# Altium PCB PCB1.PcbDoc
Units mil, origin at the board's own origin, x right, y up, seen from the top; angles counter-clockwise.
Board outline 1480 x 1785 mil, 4 copper layers (Top Layer, GND, POWER, Bottom Layer), stack 23.756 mil thick; 45 components, 35 nets, 209 pads, 41 vias.
Unrouted connection lines stored in the file: 1.
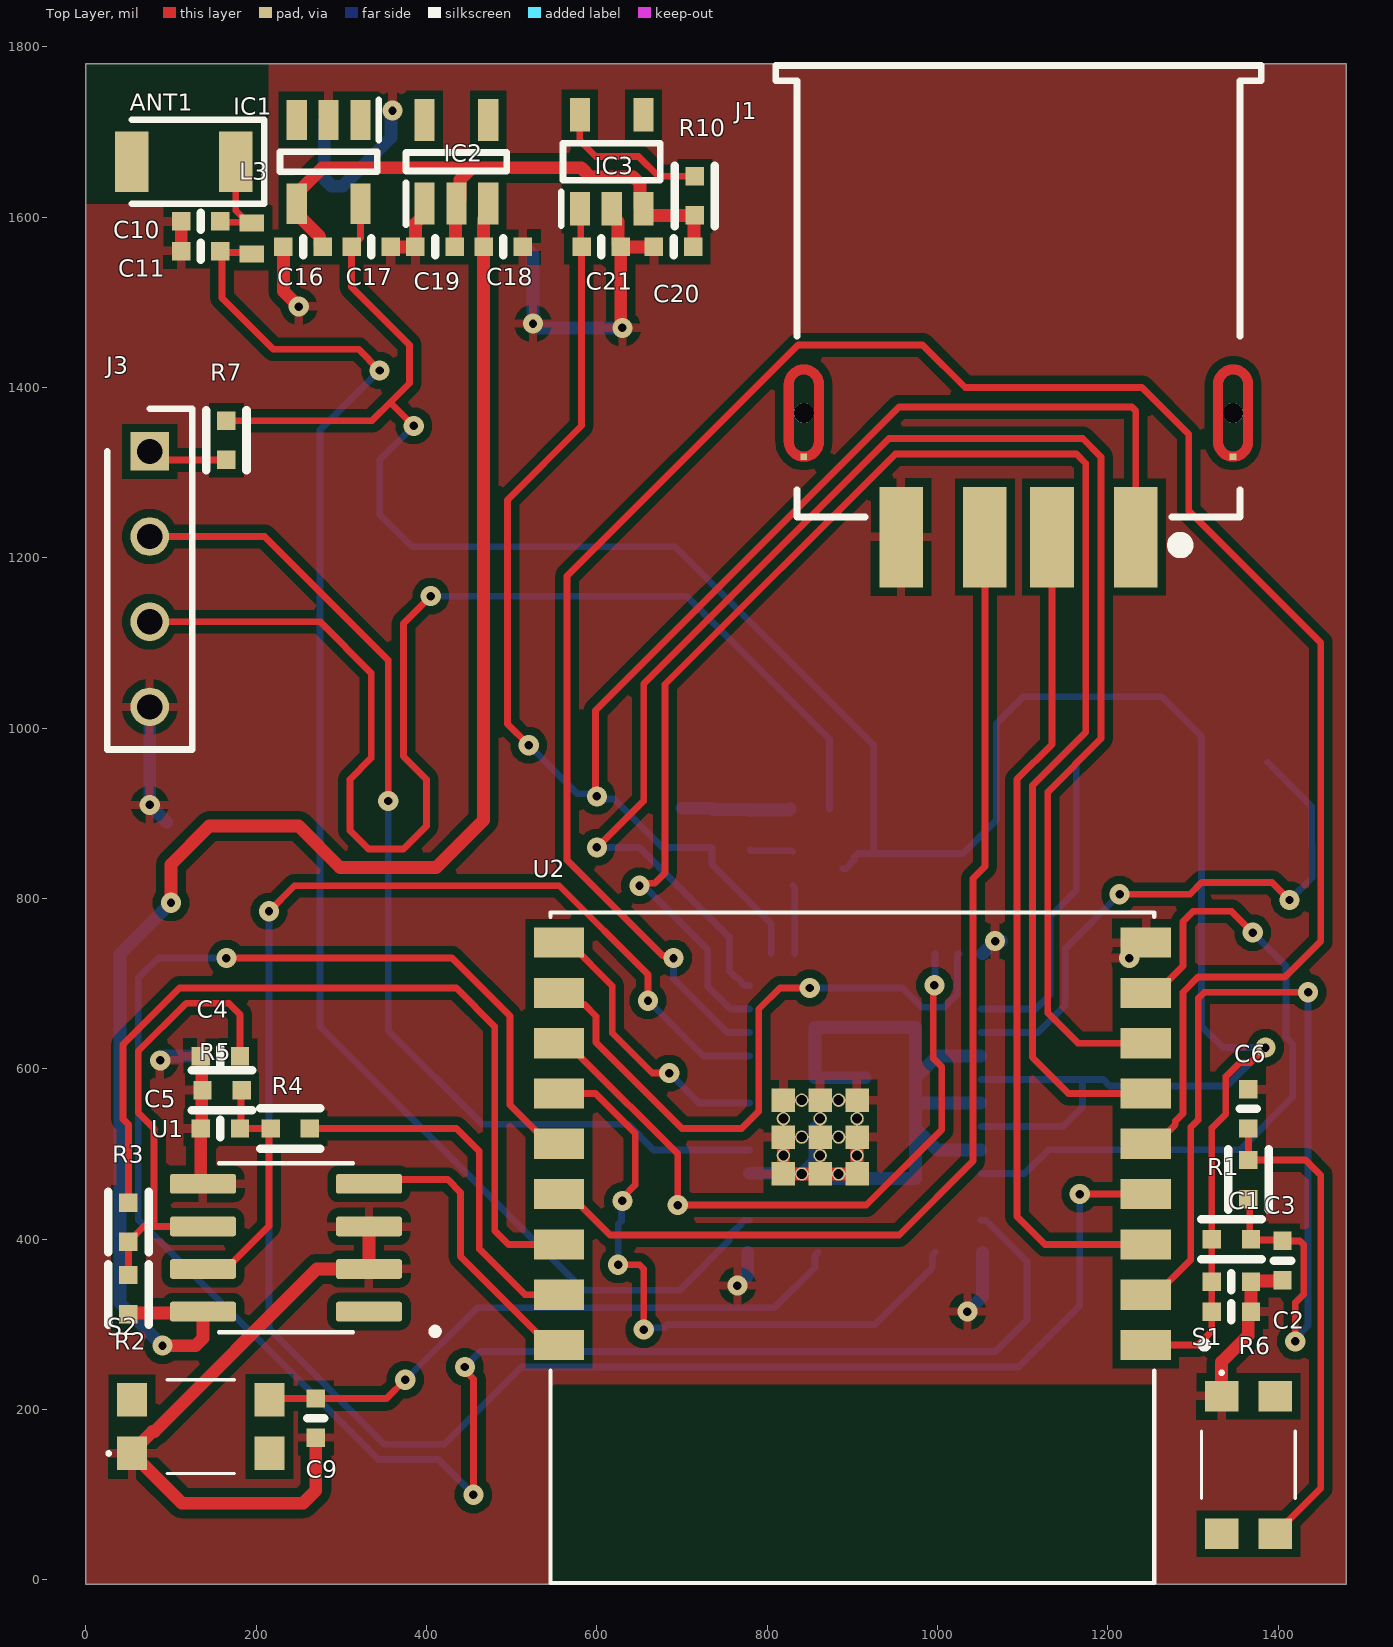
[diagram p0: Top Layer view]
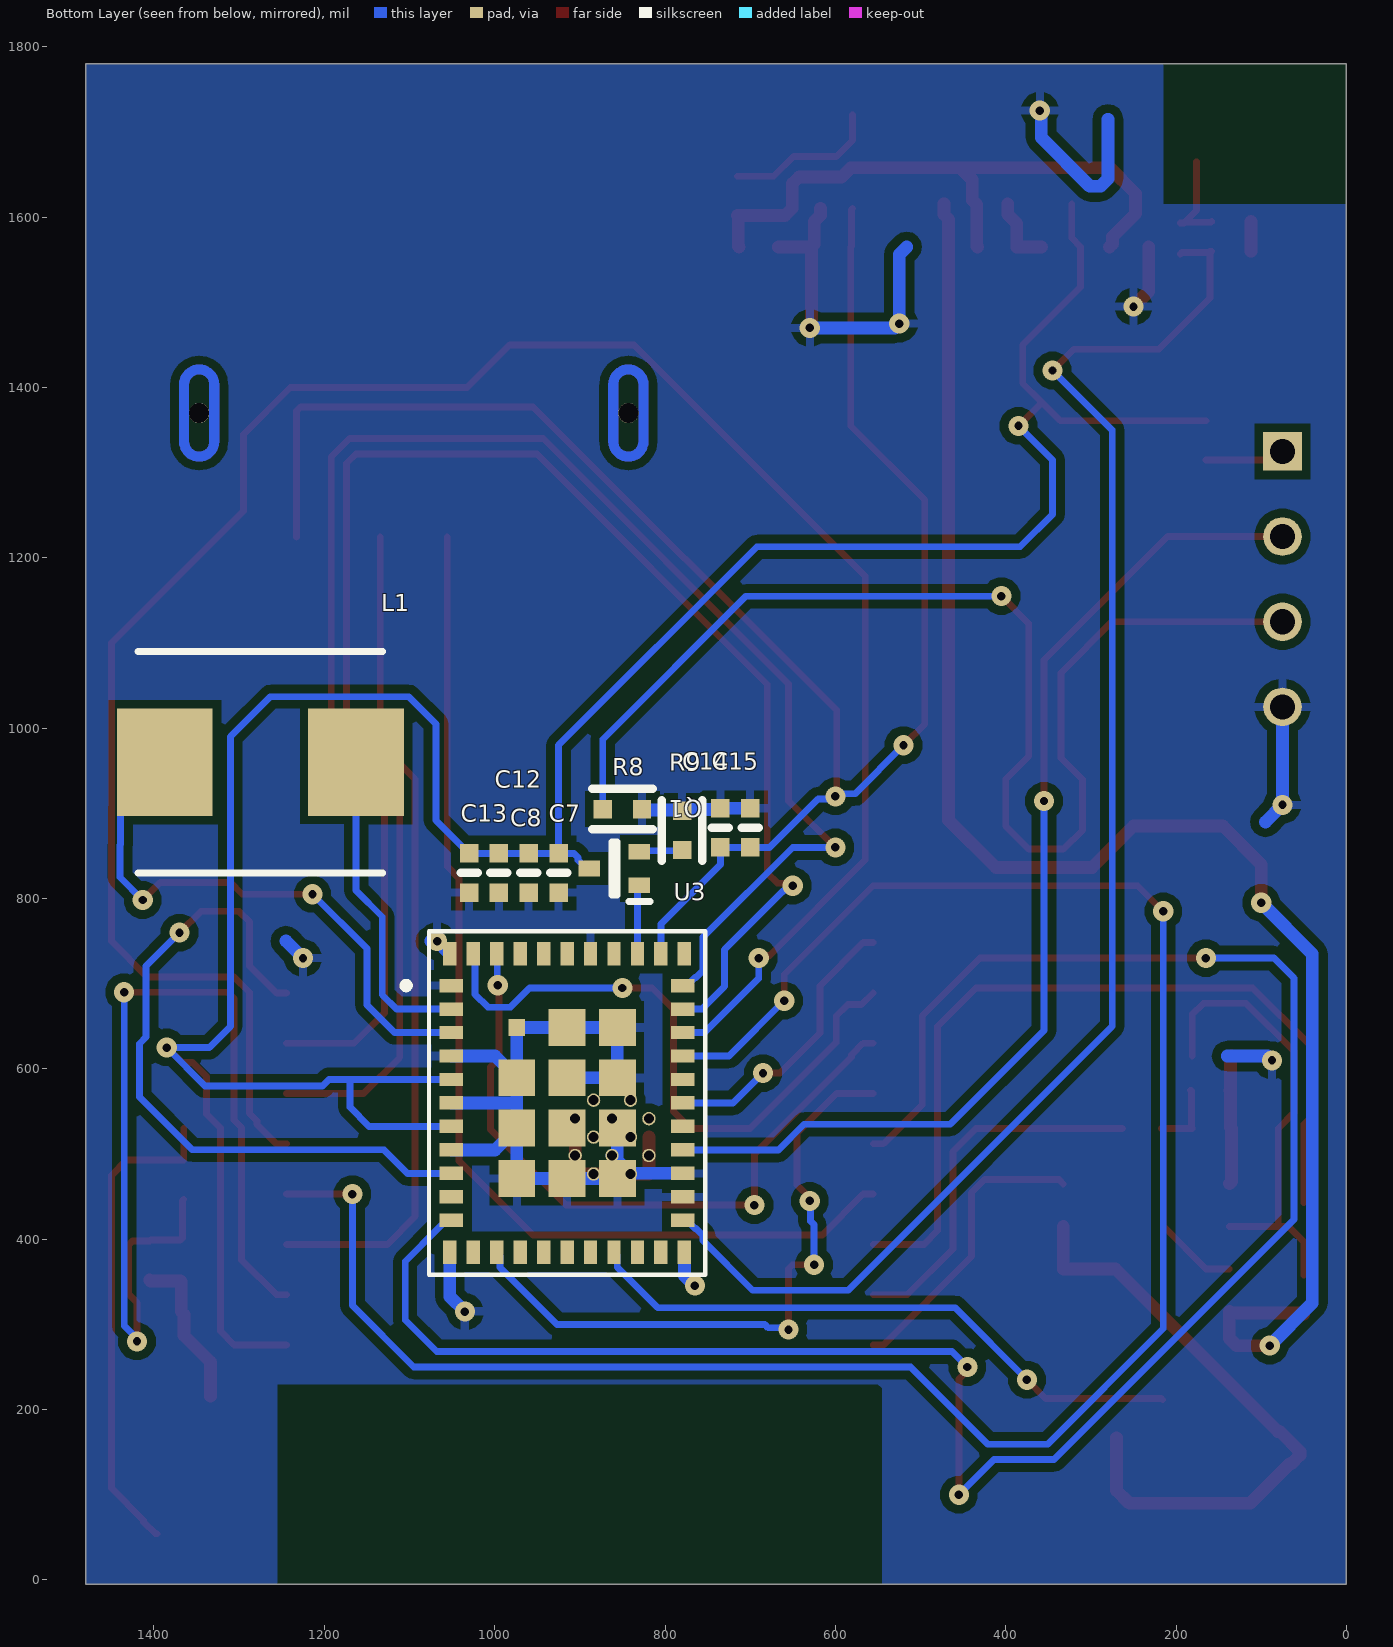
[diagram p1: Bottom Layer view, seen from below]
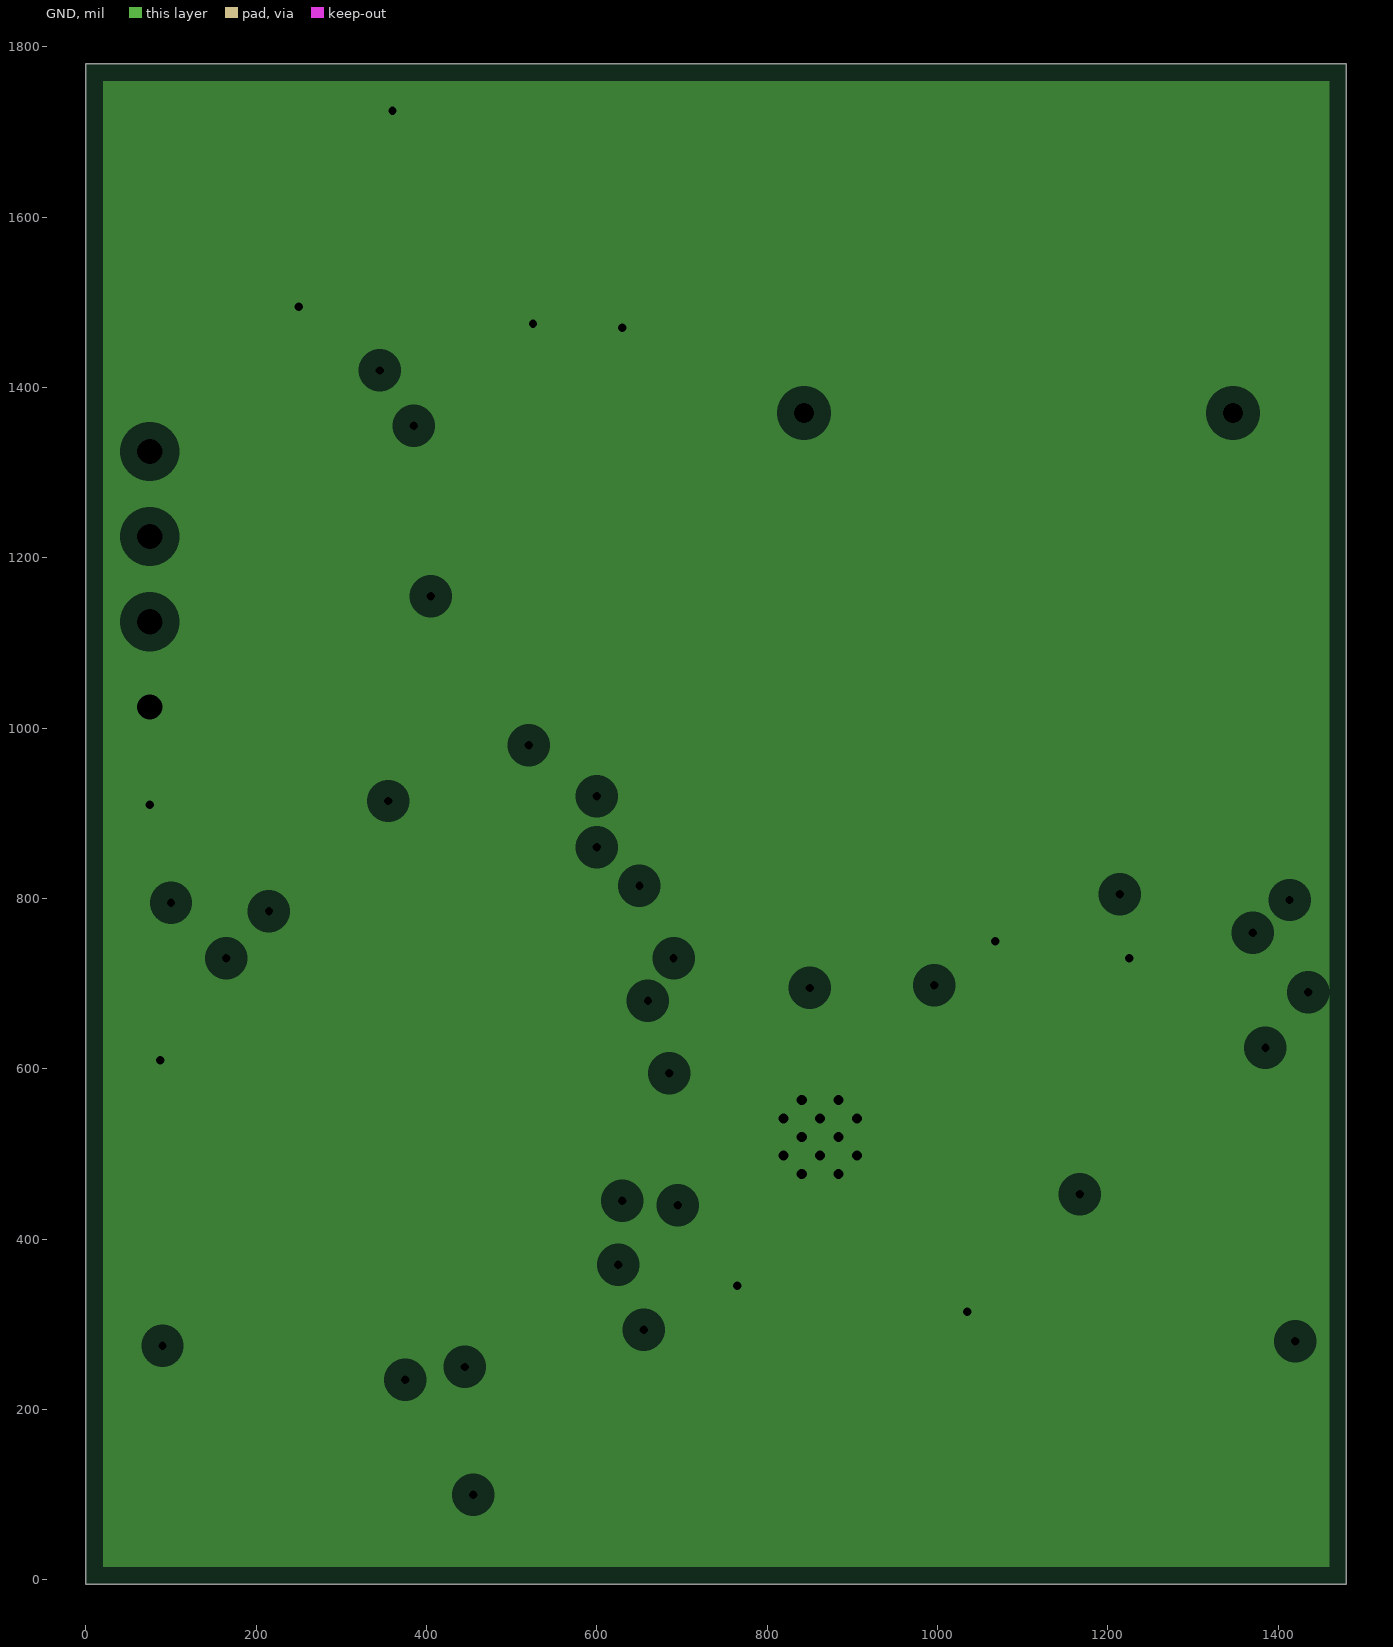
[diagram p2: GND, clearances drawn from the general rule]
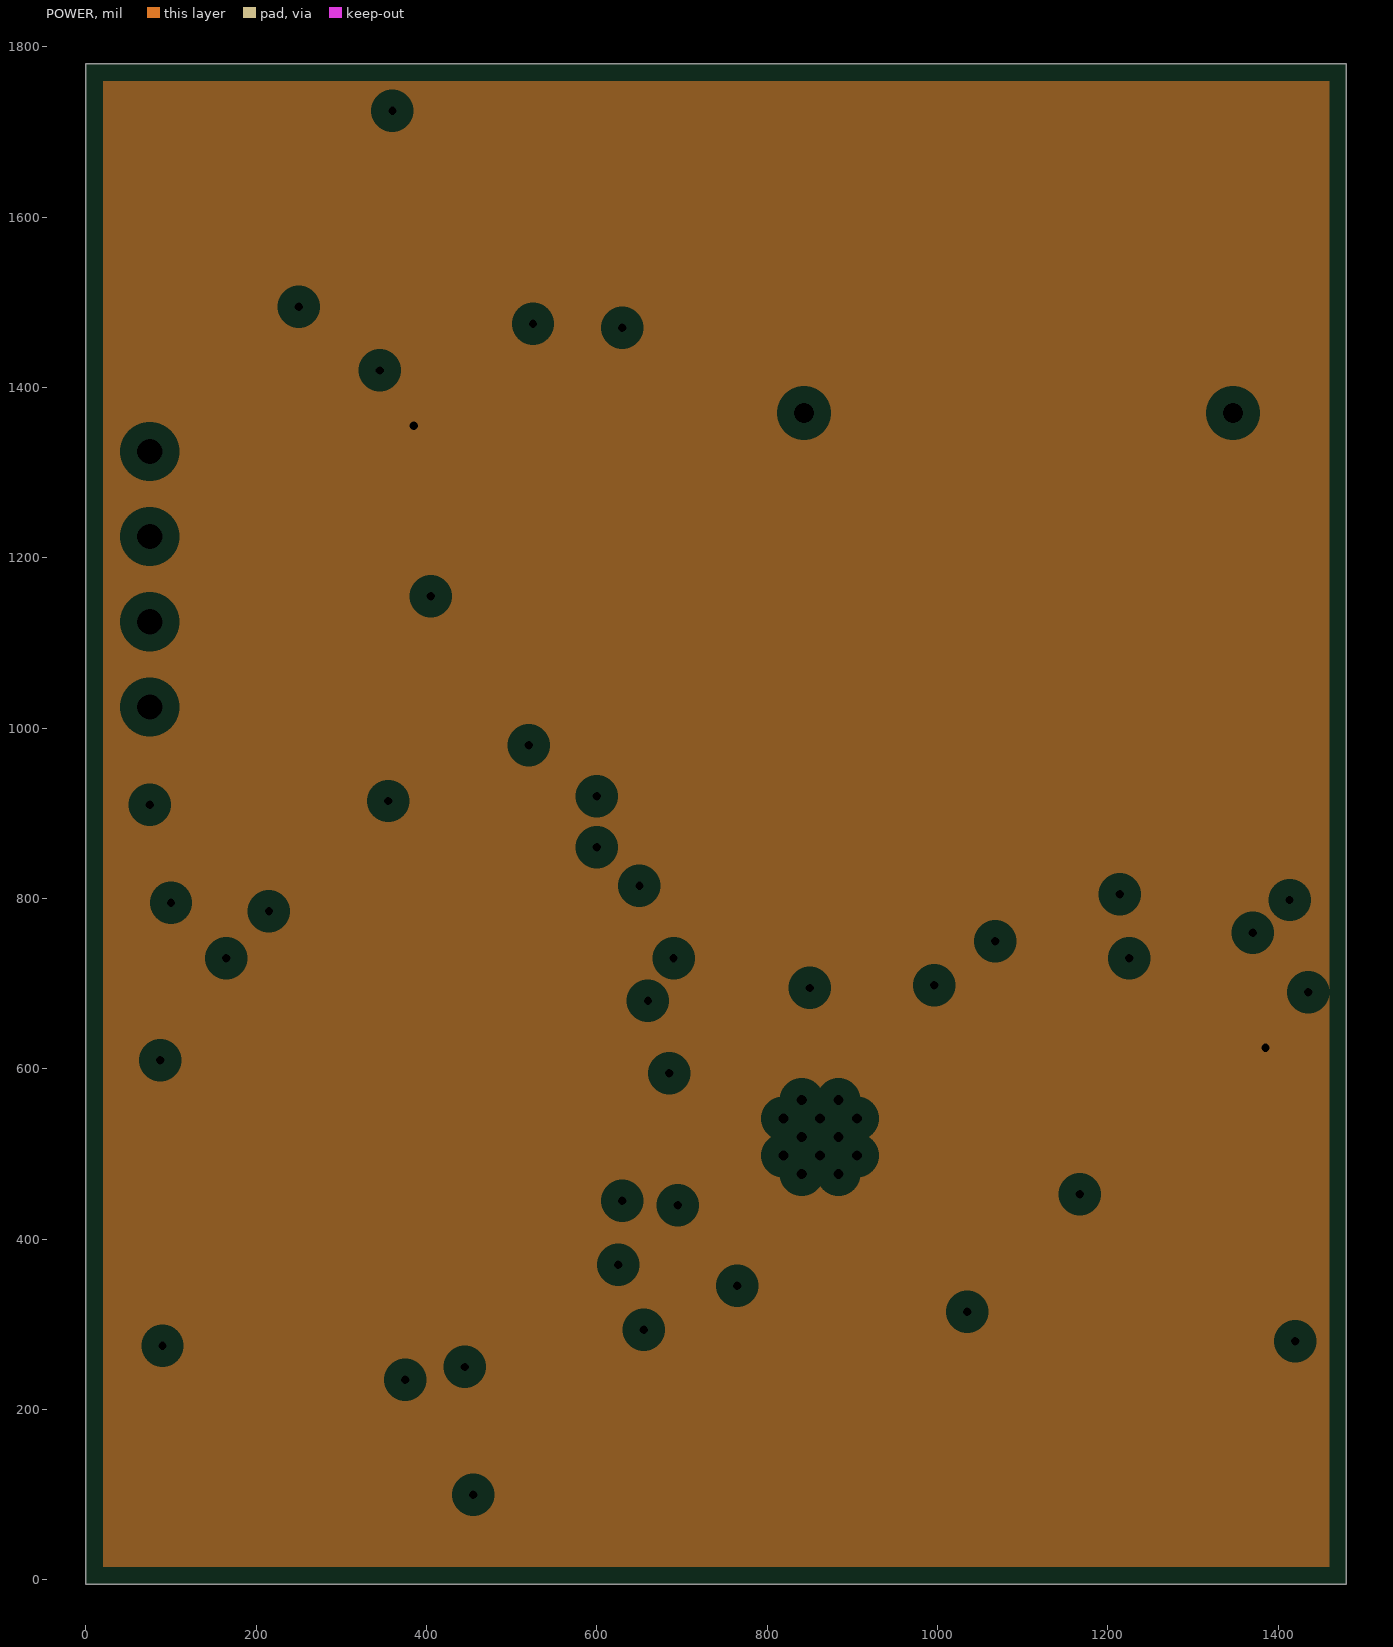
[diagram p3: POWER, clearances drawn from the general rule]
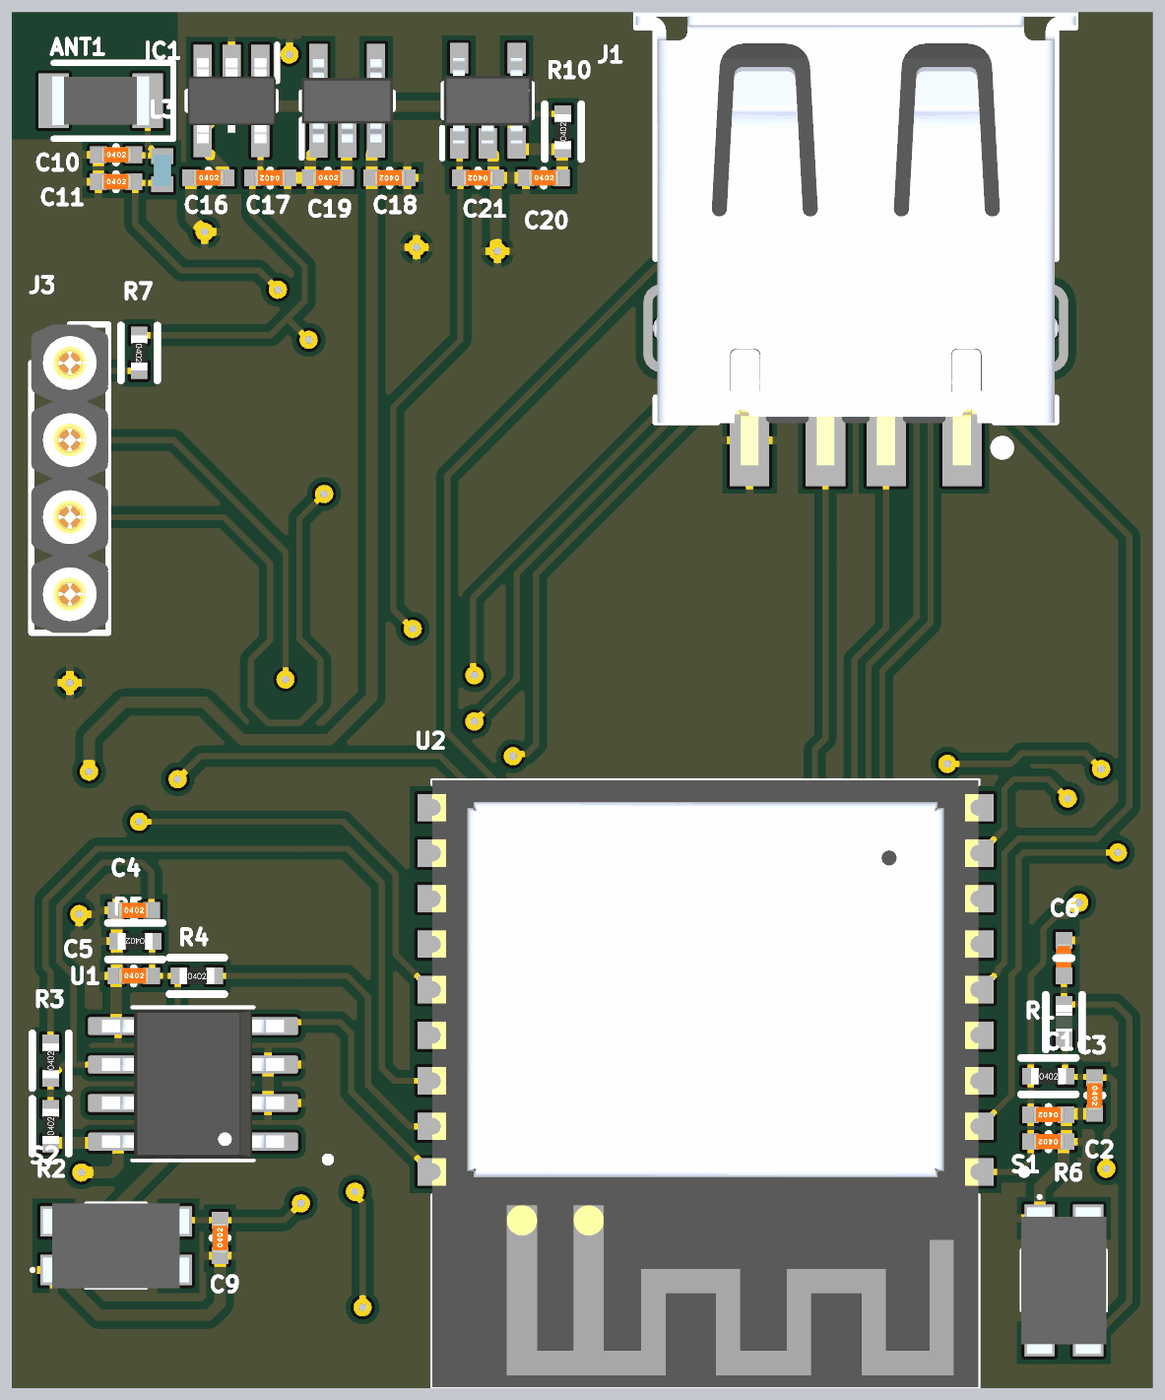
[diagram p4: 3D render of the assembled board from above, using the file's embedded part models]
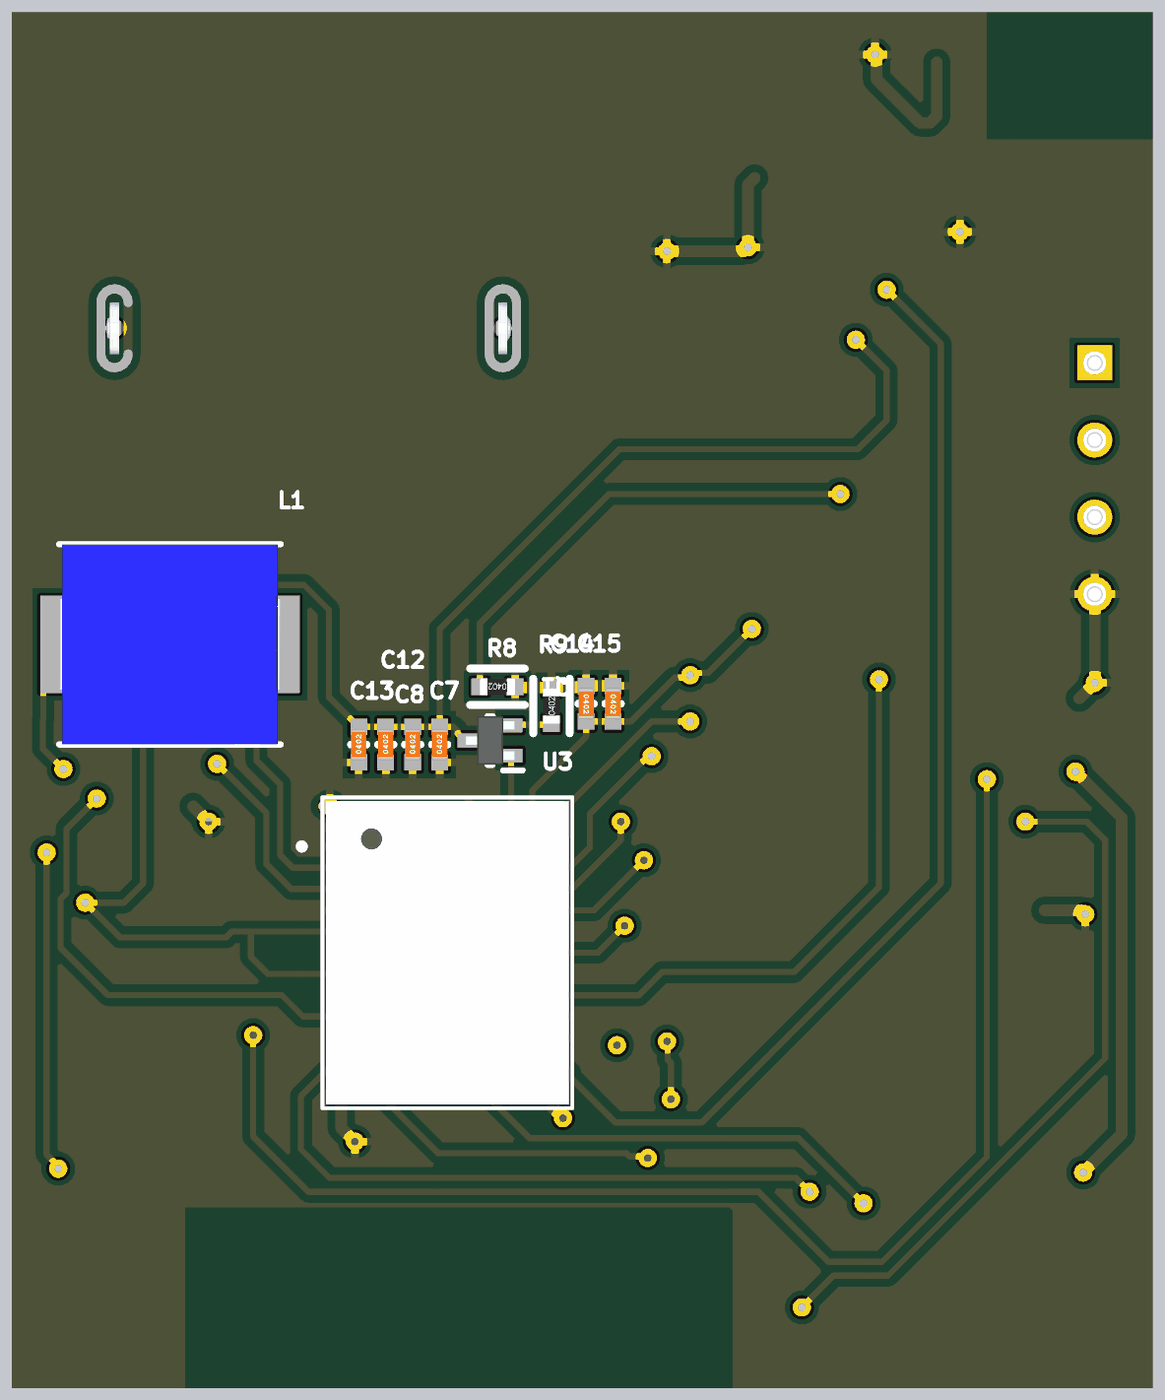
[diagram p5: 3D render of the assembled board from below, using the file's embedded part models]

## Layer stack, top to bottom
Top Solder: solder mask 0.4, Solder Resist, Dk 3.5
Top Layer: signal copper 1.4
Dielectric 2: prepreg 2.8, PP-006, Dk 4.1
GND: plane copper 1.378, net GND
Dielectric 1: dielectric 12.6, FR-4, Dk 4.8
POWER: plane copper 1.378, net VDD_RF
Dielectric 3: prepreg 2.8, PP-006, Dk 4.1
Bottom Layer: signal copper 1.4
Bottom Solder: solder mask 0.4, Solder Resist, Dk 3.5

## Board outline
0,-5 1480,-5 1480,1780 0,1780

## Design rules (kind name [scope] priority, off if disabled: settings)
Clearance [All] p1: gap=10 ignorepadtopadclearanceinfootprint=TRUE except(0: Arc-Hole Track-Hole SMDPad-Hole THPad-Hole Via-Hole Fill-Hole Poly-Hole Region-Hole Text-Hole)
PlaneClearance [All] p1: clearance=20
PlaneConnect [All] p1: planeconnectstyle=Relief reliefexpansion=20 reliefentries=4 reliefconductorwidth=10 reliefairgap=10
PolygonConnect [All] p1: connectstyle=Relief reliefconductorwidth=10 reliefentries=4 polygonreliefangle="90 Angle" airgapwidth=10
RoutingVias [All] p1: holewidth=9.84 width=23.62 viastyle="Through Hole" minholewidth=7.87 minwidth=19.68 maxholewidth=11.81 maxwidth=27.56
SolderMaskExpansion [All] p1: expansion=4 istentingtop=FALSE
Width [All] p1: maxlimit=100 minlimit=6 preferedwidth=10 minimp=50.000000 maximp=50.000000 favimp=50.000000
28 further rules are at their usual default settings.

## Classes and differential pairs
component class "Voltage Regulator": C16 C17 C18 C19 C20 C21 IC1 IC2 IC3 R10
component class "Main MCU": C1 C2 C3 C4 C5 C6 J1 R1 R2 R3 R4 R5 R6 S1 U1 U2
component class "Lora module": ANT1 C7 C8 C9 C10 C11 C12 C13 C14 C15 J3 L1 L3 Q1 R7 R8 R9 S2 U3

## Components (designator, comment, footprint, x,y, rotation, side; value= is the part's Value field where it differs from the comment)
ANT1 "2108838-1" ANTC3216X140N 115,1665 r180 top
C1 "0.10µF" SMD-0402C#1 1345,350 r90 top
C2 "10µF" SMD-0402C#1 1345,315 r90 top
C3 "0.10µF" SMD-0402C#1 1405,375 r180 top
C4 "2200pF" SMD-0402C#1 158,615 r270 top
C5 "2200pF" SMD-0402C#1 158,530 r270 top
C6 "0.10µF" SMD-0402C#2 1365,553 r180 top
C7 "0.10µF" SMD-0402C#1 925,830 r180 bottom
C8 "10µF" SMD-0402C#1 960,830 r180 bottom
C9 "0.10µF" SMD-0402C#1 270,190 r0 top
C10 "0.10µF" SMD-0402C#1 135,1595 r270 top
C11 "0.10µF" SMD-0402C#1 135,1560 r270 top
C12 "0.10µF" SMD-0402C#1 995,830 r180 bottom
C13 "10µF" SMD-0402C#1 1030,830 r180 bottom
C14 "0.10µF" SMD-0402C#1 735,883 r0 bottom
C15 "10µF" SMD-0402C#1 700,883 r0 bottom
C16 "0.10µF" SMD-0402C#1 255,1565 r270 top
C17 "0.47µF" SMD-0402C#1 335,1565 r90 top
C18 "1µF" SMD-0402C#1 490,1565 r90 top
C19 "1µF" SMD-0402C#1 410,1565 r270 top
C20 "0.10µF" SMD-0402C#1 690,1565 r270 top
C21 "0.10µF" SMD-0402C#1 605,1565 r90 top
IC1 "ST715M33R" SOT95P280X145-5N 285,1665 r270 top
IC2 "NCP716BCSN500T1G" SOT95P275X110-5N 435,1665 r90 top
IC3 "R1154N120B-TR-FE" SOT95P280X130-5N 617.4,1665.12 r90 top
J1 "USB1046-XX-XXXX-X-B-X_REVB" GCT_USB1046-XX-XXXX-X-B-X_REVB 1095,1370 r180 top
J3 "D01-9970442" RHDR4W53P0X254_1X4_1016X246X254P 75,1325 r270 top
L1 "SRP7028CC-150M" INDPM7366X300N 1275,960 r0 bottom
L3 "LQW15AN17NG8ZD" INDC1006X60N 195,1575 r270 top
Q1 "RE1C001UNTCL" SOTFL50P160X85-3N 859.53,835.32 r0 bottom
R1 "0.0" SMD-0402-RES#1 1345,400 r270 top
R2 "4.7k" SMD-0402-RES#1 50,335 r0 top
R3 "47k" SMD-0402-RES#1 50,420 r0 top
R4 "47k" SMD-0402-RES#1 240,530 r270 top
R5 "4.7k" SMD-0402-RES#1 160,575 r90 top
R6 "0.0" SMD-0402-RES#2 1365,470 r0 top
R7 "100k" SMD-0402-RES#1 165,1338 r180 top
R8 "100k" SMD-0402-RES#1 850,905 r90 bottom
R9 "10k" SMD-0402-RES#1 780,880 r180 bottom
R10 "10k" SMD-0402-RES#1 715,1625 r0 top
S1 "KMR241NGLFS" KMR241NGLFS 1365,135 r270 top
S2 "KMR241NGLFS" KMR241NGLFS 135,180 r0 top
U1 "MAX3444EESA" SOIC127P600X175-8N 235,390 r180 top
U2 "ESP32-C3-WROOM-02-H4" MODULE_ESP32-C3-WROOM-02-H4 900,390 r180 top
U3 "LBAA0QB1SJ-296" MODULE_LBAA0QB1SJ-296 915,560 r180 bottom

## Footprints (in the part's own frame and the unit in brackets; to place one, negate y for a bottom-side part, rotate by r counter-clockwise, add the part's x,y. Pads: shape width x height; smd on the part's side, far side on the other; paste and mask are expansions set on the pad)
ANTC3216X140N [mm]
  rect 1x1.8 smd: 1(-1.55,0) 2(1.55,0)
  silkscreen extent -2.4,-1.25 1.55,1.25, body extent -1.6,-0.8 1.6,0.8, height 1.4
GCT_USB1046-XX-XXXX-X-B-X_REVB [mm]
  rect 1.3x3 smd: 1(-3.5,3.7) 2(-1,3.7) 3(1,3.7) 4(3.5,3.7)
  rect 0.2x0.2 smd paste-1 mask+0: P1(-6.4,1.3) P2(6.4,1.3)
  round 0.6 hole 0.6 unplated: ""(-6.4,0) ""(6.4,0)
  Top Layer lines w0.3: 6.85,0.85 ccw(c6.4,0.85) 6.4,1.3 ccw(c6.4,0.85) 5.95,0.85 5.95,-0.85 ccw(c6.4,-0.85) 6.4,-1.3 ccw(c6.4,-0.85) 6.85,-0.85 6.85,0.85 ; -5.95,0.85 ccw(c-6.4,0.85) -6.4,1.3 ccw(c-6.4,0.85) -6.85,0.85 -6.85,-0.85 ccw(c-6.4,-0.85) -6.4,-1.3 ccw(c-6.4,-0.85) -5.95,-0.85 -5.95,0.85
  Bottom Layer lines w0.3: 6.85,0.85 ccw(c6.4,0.85) 6.4,1.3 ccw(c6.4,0.85) 5.95,0.85 5.95,-0.85 ccw(c6.4,-0.85) 6.4,-1.3 ccw(c6.4,-0.85) 6.85,-0.85 6.85,0.85 ; -5.95,0.85 ccw(c-6.4,0.85) -6.4,1.3 ccw(c-6.4,0.85) -6.85,0.85 -6.85,-0.85 ccw(c-6.4,-0.85) -6.4,-1.3 ccw(c-6.4,-0.85) -5.95,-0.85 -5.95,0.85
  silkscreen extent -7.24,-10.36 7.24,4.13, body extent -7.25,-10.28 7.25,4.52, height 7.65
INDC1006X60N [mm]
  rect 0.51x0.73 smd: 1(-0.46,0) 2(0.46,0)
  body extent -0.5,-0.3 0.5,0.3, height 0.6
INDPM7366X300N [mm]
  rect 2.85x3.2 smd: 1(-2.85,0) 2(2.85,0)
  silkscreen extent -3.65,-3.3 3.65,3.3, body extent -3.65,-3.3 3.65,3.3, height 3
KMR241NGLFS [mm]
  rect 0.9x1 smd: 1(-2.05,-0.8) 2(2.05,-0.8) 3(2.05,0.8) 4(-2.05,0.8)
  silkscreen extent -2.8,-1.4 1,1.4, body extent -2.41,-1.4 2.41,1.4, height 2
MODULE_ESP32-C3-WROOM-02-H4 [mm]
  rect 1.5x0.9 smd: 1(-8.75,2.9) 2(-8.75,1.4) 3(-8.75,-0.1) 4(-8.75,-1.6) 5(-8.75,-3.1) 6(-8.75,-4.6) 7(-8.75,-6.1) 8(-8.75,-7.6) 9(-8.75,-9.1) 10(8.75,-9.1) 11(8.75,-7.6) 12(8.75,-6.1) 13(8.75,-4.6) 14(8.75,-3.1) 15(8.75,-1.6) 16(8.75,-0.1) 17(8.75,1.4) 18(8.75,2.9)
  rect 0.7x0.7 smd: 19(-0.14,-2.2) 20(0.96,-2.2) 21(2.06,-2.2) 22(-0.14,-3.3) 23(0.96,-3.3) 24(2.06,-3.3) 25(-0.14,-4.4) 26(0.96,-4.4) 27(2.06,-4.4)
  round 0.4 hole 0.3 mask+0: 28(0.41,-2.2) 29(1.51,-2.2) 30(-0.14,-2.75) 31(0.96,-2.75) 32(2.06,-2.75) 33(0.41,-3.3) 34(1.51,-3.3) 35(-0.14,-3.85) 36(0.96,-3.85) 37(2.06,-3.85) 38(0.41,-4.4) 39(1.51,-4.4)
  silkscreen extent -10.6,-10 9,10, body extent -9,-10 9,10, height 3.35
MODULE_LBAA0QB1SJ-296 [mm]
  rect 0.7x0.4 smd: 1(-3.45,3.5) 2(-3.45,2.8) 3(-3.45,2.1) 4(-3.45,1.4) 5(-3.45,0.7) 6(-3.45,0) 7(-3.45,-0.7) 8(-3.45,-1.4) 9(-3.45,-2.1) 10(-3.45,-2.8) 11(-3.45,-3.5) 23(3.45,-3.5) 24(3.45,-2.8) 25(3.45,-2.1) 26(3.45,-1.4) 27(3.45,-0.7) 28(3.45,0) 29(3.45,0.7) 30(3.45,1.4) 31(3.45,2.1) 32(3.45,2.8) 33(3.45,3.5)
  rect 0.4x0.7 smd: 12(-3.5,-4.45) 13(-2.8,-4.45) 14(-2.1,-4.45) 15(-1.4,-4.45) 16(-0.7,-4.45) 17(0,-4.45) 18(0.7,-4.45) 19(1.4,-4.45) 20(2.1,-4.45) 21(2.8,-4.45) 22(3.5,-4.45) 34(3.5,4.45) 35(2.8,4.45) 36(2.1,4.45) 37(1.4,4.45) 38(0.7,4.45) 39(0,4.45) 40(-0.7,4.45) 41(-1.4,4.45) 42(-2.1,4.45) 43(-2.8,4.45) 44(-3.5,4.45)
  rect 0.5x0.5 smd paste-1 mask+0: 45(-1.5,2.25)
  rect 1.1x1.1 smd: 46(-1.5,0.75) 47(-1.5,-0.75) 48(-1.5,-2.25) 49(0,-2.25) 50(1.5,-2.25) 51(1.5,-0.75) 52(1.5,0.75) 53(1.5,2.25) 54(0,2.25) 55(0,0.75) 56(0,-0.75)
  silkscreen extent -4.9,-5.12 4.12,5.12, body extent -4,-5 4,5, height 1.6
RHDR4W53P0X254_1X4_1016X246X254P [mm]
  rect 1.15x1.15 hole 0.75: 1(0,0)
  round 1.15 hole 0.75: 2(2.54,0) 3(5.08,0) 4(7.62,0)
  silkscreen extent -1.27,-1.27 8.89,1.27, body extent -1.27,-1.27 8.89,1.27, height 4.2
SMD-0402-RES#1 [mm]
  rect 0.55x0.55 smd: 1(0,0.584) 2(0,-0.584)
  silkscreen extent -0.6,-0.9 0.6,0.9, body extent -0.28,-0.57 0.27,0.58, height 0.41
SMD-0402-RES#2 [mm]
  rect 0.55x0.55 smd: 1(0,-0.584) 2(0,0.584)
  silkscreen extent -0.6,-0.9 0.6,0.9, body extent -0.27,-0.58 0.28,0.57
SMD-0402C#1 [mm]
  rect 0.55x0.55 smd: 1(0,0.584) 2(0,-0.584)
  silkscreen extent -0.25,0 0.25,0, body extent -0.25,-0.51 0.25,0.51, height 0.51
SMD-0402C#2 [mm]
  rect 0.55x0.55 smd: 1(0,-0.584) 2(0,0.584)
  silkscreen extent -0.25,0 0.25,0, body extent -0.25,-0.51 0.25,0.51
SOIC127P600X175-8N [mm]
  rrect25% 1.97x0.59 smd: 1(-2.475,1.905) 2(-2.475,0.635) 3(-2.475,-0.635) 4(-2.475,-1.905) 5(2.475,-1.905) 6(2.475,-0.635) 7(2.475,0.635) 8(2.475,1.905)
  silkscreen extent -4.54,-2.52 2,2.59, body extent -3,-2.45 3,2.45, height 1.75
SOT95P275X110-5N [mm]
  rect 1.25x0.6 smd: 1(-1.25,0.95) 2(-1.25,0) 3(-1.25,-0.95) 4(1.25,-0.95) 5(1.25,0.95)
  silkscreen extent -1.88,-1.5 0.28,1.5, body extent -1.38,-1.5 1.38,1.5, height 1.1
SOT95P280X130-5N [mm]
  rect 1x0.6 smd: 1(-1.4,0.95) 2(-1.4,0) 3(-1.4,-0.95) 4(1.4,-0.95) 5(1.4,0.95)
  silkscreen extent -1.9,-1.45 0.55,1.5, body extent -1.4,-1.45 1.4,1.45, height 1.3
SOT95P280X145-5N [mm]
  rect 1.2x0.6 smd: 1(-1.25,0.95) 2(-1.25,0) 3(-1.25,-0.95) 4(1.25,-0.95) 5(1.25,0.95)
  silkscreen extent -1.85,-1.45 0.3,1.5, body extent -1.4,-1.45 1.4,1.45, height 1.2
SOTFL50P160X85-3N [mm]
  rect 0.64x0.47 smd: 1(-0.75,0.5) 2(-0.75,-0.5) 3(0.75,0)
  silkscreen extent -1.07,-0.8 0.08,0.98, body extent -0.8,-0.8 0.8,0.8, height 0.85

## Part data
ANT1: "Antenna", Manufacturer_Name="TE Connectivity", Mouser Part Number=571-2108838-1, Arrow Part Number=2108838-1, Arrow Price/Stock=https://www.arrow.com/en/products/2108838-1/te-connectivity?region=europe, Datasheet Link=https://www.mouser.de/datasheet/2/418/8/ENG_DS_2108838_A1-2509087.pdf, Height=1.4mm, Manufacturer_Part_Number=2108838-1, Mouser Price/Stock=https://www.mouser.co.uk/ProductDetail/TE-Connectivity/2108838-1?qs=pBJMDPsKWf2GaqEOsIISlQ%3D%3D
C1 C3 C6 C7 C9 C10 C11 C12 C14 C16 C20 C21: library part GCM155R71C104KA55D, "CAP CER 0.1UF 16V X7R 0402", Digi-Key Part Number=490-4759-1-ND, Manufacturer="Murata Electronics North America", Operating Temperature="-55°C ~ 125°C", Package / Case="0402 (1005 Metric)", Ratings=AEC-Q200, Temperature Coefficient=X7R, Tolerance=±10%, Voltage=16V, @ qty=0, Applications=Automotive, Datasheets=http://www.murata.com/~/media/webrenewal/support/library/catalog/products/capacitor/mlcc/c03e.ashx, Factory Stock=0, Features=-, Height - Seated (Max)=-, Image=//media.digikey.com/Renders/Murata%20Renders/ZRB-SERIES-0402.jpg, Lead Spacing=-, Lead Style=-, Minimum Quantity=1, Mounting Type="Surface Mount, MLCC", Packaging="Cut Tape (CT)", Part Number=GCM155R71C104KA55D, Part Status=Active, Quantity Available=734194, Series=GCM, Size / Dimension="0.039\" L x 0.020\" W (1.00mm x 0.50mm)", Thickness (Max)="0.022\" (0.55mm)", Unit Price (USD)=0.1
C2 C8 C13 C15: library part GRJ155R60J106ME11D, "CAP CER 10UF 6.3V X5R 0402", Digi-Key Part Number=490-13211-1-ND, Manufacturer="Murata Electronics North America", Operating Temperature="-55°C ~ 85°C", Package / Case="0402 (1005 Metric)", Ratings=-, Temperature Coefficient=X5R, Tolerance=±20%, Voltage=6.3V, @ qty=0, Applications="Boardflex Sensitive", Datasheets=http://psearch.en.murata.com/capacitor/product/GRJ155R60J106ME11%23.pdf, Factory Stock=0, Features="Derating Recommended, Soft Termination", Height - Seated (Max)=-, Image=//media.digikey.com/Renders/Murata%20Renders/ZRB-SERIES-0402.jpg, Lead Spacing=-, Lead Style=-, Minimum Quantity=1, Mounting Type="Surface Mount, MLCC", Packaging="Cut Tape (CT)", Part Number=GRJ155R60J106ME11D, Part Status=Active, Quantity Available=64064, Series=GRJ, Size / Dimension="0.039\" L x 0.020\" W (1.00mm x 0.50mm)", Thickness (Max)="0.028\" (0.70mm)", Unit Price (USD)=0.23
C4 C5: library part GCM155R71H222KA37D, "CAP CER 2200PF 50V X7R 0402", Digi-Key Part Number=490-4914-1-ND, Manufacturer="Murata Electronics North America", Operating Temperature="-55°C ~ 125°C", Package / Case="0402 (1005 Metric)", Ratings=AEC-Q200, Temperature Coefficient=X7R, Tolerance=±10%, Voltage=50V, @ qty=0, Applications=Automotive, Datasheets=http://www.murata.com/~/media/webrenewal/support/library/catalog/products/capacitor/mlcc/c03e.ashx, Factory Stock=0, Features=-, Height - Seated (Max)=-, Image=//media.digikey.com/Renders/Murata%20Renders/ZRB-SERIES-0402.jpg, Lead Spacing=-, Lead Style=-, Minimum Quantity=1, Mounting Type="Surface Mount, MLCC", Packaging="Cut Tape (CT)", Part Number=GCM155R71H222KA37D, Part Status=Active, Quantity Available=56459, Series=GCM, Size / Dimension="0.039\" L x 0.020\" W (1.00mm x 0.50mm)", Thickness (Max)="0.022\" (0.55mm)", Unit Price (USD)=0.1
C17: library part GRM155R61C474KE01D, "CAP CER 0.47UF 16V X5R 0402", Digi-Key Part Number=490-13421-1-ND, Manufacturer="Murata Electronics North America", Operating Temperature="-55°C ~ 85°C", Package / Case="0402 (1005 Metric)", Ratings=-, Temperature Coefficient=X5R, Tolerance=±10%, Voltage=16V, @ qty=0, Applications="General Purpose", Datasheets=http://www.murata.com/~/media/webrenewal/support/library/catalog/products/capacitor/mlcc/c02e.pdf, Factory Stock=0, Features=-, Height - Seated (Max)=-, Image=//media.digikey.com/Renders/Murata%20Renders/ZRB-SERIES-0402.jpg, Lead Spacing=-, Lead Style=-, Minimum Quantity=1, Mounting Type="Surface Mount, MLCC", Packaging="Cut Tape (CT)", Part Number=GRM155R61C474KE01D, Part Status=Active, Quantity Available=8585, Series=GRM, Size / Dimension="0.039\" L x 0.020\" W (1.00mm x 0.50mm)", Thickness (Max)="0.022\" (0.55mm)", Unit Price (USD)=0.1
C18 C19: library part GRM155C81C105KE11D, "CAP CER 1UF 16V X6S 0402", Digi-Key Part Number=490-12700-1-ND, Manufacturer="Murata Electronics North America", Operating Temperature="-55°C ~ 105°C", Package / Case="0402 (1005 Metric)", Ratings=-, Temperature Coefficient=X6S, Tolerance=±10%, Voltage=16V, @ qty=0, Applications="General Purpose", Datasheets=http://www.murata.com/~/media/webrenewal/support/library/catalog/products/capacitor/mlcc/c02e.pdf, Factory Stock=0, Features=-, Height - Seated (Max)=-, Image=//media.digikey.com/Renders/Murata%20Renders/ZRB-SERIES-0402.jpg, Lead Spacing=-, Lead Style=-, Minimum Quantity=1, Mounting Type="Surface Mount, MLCC", Packaging="Cut Tape (CT)", Part Number=GRM155C81C105KE11D, Part Status=Active, Quantity Available=37242, Series=GRM, Size / Dimension="0.039\" L x 0.020\" W (1.00mm x 0.50mm)", Thickness (Max)="0.024\" (0.60mm)", Unit Price (USD)=0.29
IC1: "Integrated Circuit", Manufacturer_Name=STMicroelectronics, Mouser Part Number=511-ST715M33R, Arrow Part Number=ST715M33R, Arrow Price/Stock=https://www.arrow.com/en/products/st715m33r/stmicroelectronics?region=nac, Datasheet Link=https://datasheet.datasheetarchive.com/originals/distributors/Datasheets-DGA25/1774080.pdf, Height=1.45mm, Manufacturer_Part_Number=ST715M33R, Mouser Price/Stock=https://www.mouser.co.uk/ProductDetail/STMicroelectronics/ST715M33R?qs=SU4Xa%252BYHGQp%252B3Qoof482xw%3D%3D
IC2: "Integrated Circuit", Manufacturer_Name=onsemi, Mouser Part Number=863-NCP716BCSN500T1G, Arrow Part Number=NCP716BCSN500T1G, Arrow Price/Stock=https://www.arrow.com/en/products/ncp716bcsn500t1g/on-semiconductor?region=nac, Datasheet Link=https://www.mouser.jp/datasheet/2/308/NCP716BC_D-2255835.pdf, Height=1.1mm, Manufacturer_Part_Number=NCP716BCSN500T1G, Mouser Price/Stock=https://www.mouser.co.uk/ProductDetail/onsemi/NCP716BCSN500T1G?qs=stqOd1AaK79aqdrzlQcxdg%3D%3D
IC3: "Integrated Circuit", Manufacturer_Name=Nisshinbo, Mouser Part Number=848-R1154N120BTRFE, Datasheet Link=https://www.nisshinbo-microdevices.co.jp/en/pdf/datasheet/r1154-ea.pdf, Height=1.3mm, Manufacturer_Part_Number=R1154N120B-TR-FE, Mouser Price/Stock=https://www.mouser.co.uk/ProductDetail/Nisshinbo/R1154N120B-TR-FE?qs=ilL34mSzaLixPjYq%2FYViaw%3D%3D
J1: "USB Receptacle, Type A, 4 Pin, Surface Mount, Horizontal, Top Mount, with Shell Stakes", Package=None, Availability=Unavailable, MF="{'manufacturer': u'Global Connector Technology'}", MP=USB1046-XX-XXXX-X-B-X_REVB, Price=None
J3: "Connector", Manufacturer_Name=Harwin, Mouser Part Number=855-D01-9970442, Datasheet Link=https://cdn.harwin.com/pdfs/D01-997.pdf, Height=2.54mm, Manufacturer_Part_Number=D01-9970442, Mouser Price/Stock=https://www.mouser.co.uk/ProductDetail/Harwin/D01-9970442?qs=ecHgFjcWJS%252BUW8IMx%252Bcpow%3D%3D
L1: "Inductor", Manufacturer_Name=Bourns, Datasheet Link=https://www.bourns.com/docs/Product-Datasheets/SRP7028CC.pdf, Height=3mm, Manufacturer_Part_Number=SRP7028CC-150M
L3: "FIXED IND 17NH 1A 126 MOHM", Package=None, Availability=Unavailable, MF="{'manufacturer': u'Murata'}", MP=LQW15AN17NG8ZD, Price=None
Q1: "MOSFET (N-Channel)", Manufacturer_Name="ROHM Semiconductor", Mouser Part Number=755-RE1C001UNTCL, Datasheet Link=https://datasheet.datasheetarchive.com/originals/distributors/Datasheets_SAMA/a252995f86c5e28cb0f632a782a2eea5.pdf, Height=0.85mm, Manufacturer_Part_Number=RE1C001UNTCL, Mouser Price/Stock=https://www.mouser.co.uk/ProductDetail/ROHM-Semiconductor/RE1C001UNTCL?qs=QcFhgjUTvvoqHeGWcl8O5g%3D%3D
R1 R6: library part ERJ-2GE0R00X, "RES SMD 0.0OHM JUMPER 1/10W 0402", Digi-Key Part Number=P0.0JCT-ND, Manufacturer="Panasonic Electronic Components", Operating Temperature="-55°C ~ 155°C", Package / Case="0402 (1005 Metric)", Power (Watts)="0.1W, 1/10W", Supplier Device Package=0402, Temperature Coefficient=-, Tolerance=Jumper, @ qty=1500, Composition="Thick Film", Datasheets=http://industrial.panasonic.com/www-cgi/jvcr13pz.cgi?E+PZ+3+AOA0001+ERJ2GE0R00X+7+WW, Factory Stock=0, Failure Rate=-, Features="Automotive AEC-Q200", Height - Seated (Max)="0.016\" (0.40mm)", Image=//media.digikey.com/Photos/Panasonic%20Photos/ERJ-PA2-Series.jpg, Minimum Quantity=1, Number of Terminations=2, Packaging="Cut Tape (CT)", Part Number=ERJ-2GE0R00X, Part Status=Active, Quantity Available=3152483, Series=ERJ, Size / Dimension="0.039\" L x 0.020\" W (1.00mm x 0.50mm)", Unit Price (USD)=0.00384
R2 R5: library part ERJ-2GEJ472X, "RES SMD 4.7K OHM 5% 1/10W 0402", Digi-Key Part Number=P4.7KJCT-ND, Manufacturer="Panasonic Electronic Components", Operating Temperature="-55°C ~ 155°C", Package / Case="0402 (1005 Metric)", Power (Watts)="0.1W, 1/10W", Supplier Device Package=0402, Temperature Coefficient=±200ppm/°C, Tolerance=±5%, @ qty=1500, Composition="Thick Film", Datasheets=http://industrial.panasonic.com/www-cgi/jvcr13pz.cgi?E+PZ+3+AOA0001+ERJ2GEJ472X+7+WW, Factory Stock=0, Failure Rate=-, Features="Automotive AEC-Q200", Height - Seated (Max)="0.016\" (0.40mm)", Image=//media.digikey.com/Photos/Panasonic%20Photos/ERJ-PA2-Series.jpg, Minimum Quantity=1, Number of Terminations=2, Packaging="Cut Tape (CT)", Part Number=ERJ-2GEJ472X, Part Status=Active, Quantity Available=8551774, Series=ERJ, Size / Dimension="0.039\" L x 0.020\" W (1.00mm x 0.50mm)", Unit Price (USD)=0.00350
R3 R4: library part ERJ-2GEJ473X, "RES SMD 47K OHM 5% 1/10W 0402", Digi-Key Part Number=P47KJCT-ND, Manufacturer="Panasonic Electronic Components", Operating Temperature="-55°C ~ 155°C", Package / Case="0402 (1005 Metric)", Power (Watts)="0.1W, 1/10W", Supplier Device Package=0402, Temperature Coefficient=±200ppm/°C, Tolerance=±5%, @ qty=1500, Composition="Thick Film", Datasheets=http://industrial.panasonic.com/www-cgi/jvcr13pz.cgi?E+PZ+3+AOA0001+ERJ2GEJ473X+7+WW, Factory Stock=0, Failure Rate=-, Features="Automotive AEC-Q200", Height - Seated (Max)="0.016\" (0.40mm)", Image=//media.digikey.com/Photos/Panasonic%20Photos/ERJ-PA2-Series.jpg, Minimum Quantity=1, Number of Terminations=2, Packaging="Cut Tape (CT)", Part Number=ERJ-2GEJ473X, Part Status=Active, Quantity Available=5182645, Series=ERJ, Size / Dimension="0.039\" L x 0.020\" W (1.00mm x 0.50mm)", Unit Price (USD)=0.00350
R7 R8: library part ERJ-2GEJ104X, "RES SMD 100K OHM 5% 1/10W 0402", Digi-Key Part Number=P100KJCT-ND, Manufacturer="Panasonic Electronic Components", Operating Temperature="-55°C ~ 155°C", Package / Case="0402 (1005 Metric)", Power (Watts)="0.1W, 1/10W", Supplier Device Package=0402, Temperature Coefficient=±200ppm/°C, Tolerance=±5%, @ qty=1500, Composition="Thick Film", Datasheets=http://industrial.panasonic.com/www-cgi/jvcr13pz.cgi?E+PZ+3+AOA0001+ERJ2GEJ104X+7+WW, Factory Stock=0, Failure Rate=-, Features="Automotive AEC-Q200", Height - Seated (Max)="0.016\" (0.40mm)", Image=//media.digikey.com/Photos/Panasonic%20Photos/ERJ-PA2-Series.jpg, Minimum Quantity=1, Number of Terminations=2, Packaging="Cut Tape (CT)", Part Number=ERJ-2GEJ104X, Part Status=Active, Quantity Available=2387986, Series=ERJ, Size / Dimension="0.039\" L x 0.020\" W (1.00mm x 0.50mm)", Unit Price (USD)=0.00350
R9 R10: library part ERJ-2GEJ103X, "RES SMD 10K OHM 5% 1/10W 0402", Digi-Key Part Number=P10KJCT-ND, Manufacturer="Panasonic Electronic Components", Operating Temperature="-55°C ~ 155°C", Package / Case="0402 (1005 Metric)", Power (Watts)="0.1W, 1/10W", Supplier Device Package=0402, Temperature Coefficient=±200ppm/°C, Tolerance=±5%, @ qty=1500, Composition="Thick Film", Datasheets=http://industrial.panasonic.com/www-cgi/jvcr13pz.cgi?E+PZ+3+AOA0001+ERJ2GEJ103X+7+WW, Factory Stock=0, Failure Rate=-, Features="Automotive AEC-Q200", Height - Seated (Max)="0.016\" (0.40mm)", Image=//media.digikey.com/Photos/Panasonic%20Photos/ERJ-PA2-Series.jpg, Minimum Quantity=1, Number of Terminations=2, Packaging="Cut Tape (CT)", Part Number=ERJ-2GEJ103X, Part Status=Active, Quantity Available=2560215, Series=ERJ, Size / Dimension="0.039\" L x 0.020\" W (1.00mm x 0.50mm)", Unit Price (USD)=0.00350
S1 S2: "Switch", Manufacturer_Name="C & K COMPONENTS", Mouser Part Number=611-KMR241NGLFS, Arrow Part Number=KMR241NGLFS, Arrow Price/Stock=https://www.arrow.com/en/products/kmr241nglfs/ck, Datasheet Link=https://www.ckswitches.com/media/1479/kmr2.pdf, Height=1.9mm, Manufacturer_Part_Number=KMR241NGLFS, Mouser Price/Stock=https://www.mouser.co.uk/ProductDetail/CK/KMR241NGLFS?qs=sb%252But3Lm4x3MOq2auuFbeg%3D%3D
U1: Package=None, Availability=Unavailable, MF="{'manufacturer': u'Analog Devices'}", MP=MAX3444EESA, Price=None
U2: "WiFi Modules (802.11) (Engineering Samples) SMD module, ESP32-C3, 4MB SPI flash, PCB antenna, -40 C +105 C   <a href=\"https://pricing.snapeda.com/parts/ESP32-C3-WROOM-02-H4/Espressif%20Systems/view-part?ref=eda\">Check availability</a> <a href=\"https://pricing.snapeda.com/parts/ESP32-C3-WROOM-02-H4/Espressif%20Systems/view-part?ref=eda\">Check availability</a>", Package=None, Availability=Unavailable, MF="{'manufacturer': u'Espressif Systems'}", MP=ESP32-C3-WROOM-02-H4, Price=None
U3: "RF Modules Type 1SJ 868/915MHz PCB Whip Flex Ant", Package=None, Availability=Unavailable, MF="{'manufacturer': u'Murata Electronics'}", MP=LBAA0QB1SJ-296, Price=None

## Via types
v1: diameter 23.62, hole 9.84, Top Layer to Bottom Layer, 39 vias
v2: diameter 23.62, hole 10, Top Layer to Bottom Layer, 2 vias

## Nets (pads, with @x,y where several pads share a name; then routed paths per layer and width w, separated by ;. In a path a pad name is that pad's centre, name@x,y a point inside that pad or via, vN(x,y) a via of type N, cw(c..) or ccw(c..) an arc to the next point about the centre after c; other vN are vias at no path point)
+5V: C18.1 IC2.3 R2.2 U1.8 | length 1936.5
  Top Layer w15: R2.2 51.5,313.5 136.06,313.5 U1.8 137.56,283.79 128.77,275 v1(90,275) ; v1(100,795) 100,840 145,885 250,885 298.5,836.5 411.5,836.5 467,892 C18.1 467,1597.59 472.4,1602.99 IC2.3
  Bottom Layer w15: v1(90,275) 40,325 40,735 v1(100,795)
A: R3.1 U2.16 | length 993
  Top Layer w8: R3.1 50,534.58 43.5,541.08 43.5,628.5 110,695 435,695 480,650 480,410 496.06,393.94 U2.16
ANT: C11.1 L3.2 U3.23 | length 1783.3
  Top Layer w8: C11.1 159.56,1558.44 C11.1@160,1558.44 ; C11.1@160,1560.04 C11.1@160,1558.44 ; L3.2 193.44,1558.44 C11.1@160,1558.44 ; v1(345,1420) 320,1445 220,1445 160,1505 C11.1@160,1558.44
  Bottom Layer w8: v1(345,1420) 275,1350 275,650 585,340 696.97,340 755.33,398.36 755.33,404.38 763.53,412.58 764.71,412.58 769.39,417.27 769.39,418.33 773.27,422.2 U3.23
B: R4.1 U2.17 | length 440.4
  Top Layer w8: R4.1 435,530 462,503 462,388.46 515.57,334.88 U2.17
D+: J1.2 U2.3 | length 979.3
  Top Layer w8: J1.2 1134.37,981.04 1093.41,940.08 1093.41,426.59 1126.06,393.94 U2.3
D-: J1.3 U2.15 | length 1280.4
  Top Layer w8: U2.15 567.32,452.99 615.31,405 955,405 1041.79,491.79 1041.79,823.61 1055.63,837.45 J1.3
EN: C3.2 R1.1 R6.1 U2.2 | length 1158.8
  Top Layer w8: U2.2 1256.3,334.88 1297.17,375.76 1297.17,531.29 1306.02,540.13 1306.02,682.52 1313.47,689.97 1415.43,689.97 ; R6.1 1366.5,445.5 1366.5,401.5 R1.1 1369,399 1404,399 C3.2 1425.31,398 1430,393.31 1430,335.55 1420,325.55 v1(1420,280) ; 1415.46,690 v1(1435,690)
  Bottom Layer w8: v1(1420,280) 1420,283.67 1435,298.67 v1(1435,690)
GND: C1.2 C2.2 C3.1 C4.2 C5.2 C6.1 C7.2 C8.2 C9.2 C10.2 C11.2 C12.2 C13.2 C14.2 C15.2 C16.2 C17.2 C18.2 C19.2 C20.2 C21.2 IC1.2 IC2.1 IC3.2 J1.4 J3.4 R5.1 R8.2 R9.1 S1.1 S2.1 U1.2 U1.3 U1.5 U2.9 U2.19 U2.20 U2.21 U2.22 U2.23 U2.24 U2.25 U2.26 U2.27 U2.28 U2.29 U2.30 U2.31 U2.32 U2.33 U2.34 U2.35 U2.36 U2.37 U2.38 U2.39 U3.1 U3.4 U3.6 U3.8 U3.12 U3.22 U3.24 U3.25 U3.34 U3.38 U3.44 U3.45 U3.46 U3.47 U3.48 U3.49 U3.50 U3.51 U3.52 U3.53 U3.54 U3.55 U3.56 | length 3471.9
  Top Layer w15: C11.2 C10.2 ; C4.2 136,614 136,576 R5.1 136,574 136,531 C5.2 135,467.56 U1.5 ; C16.2 232,1513 v1(250,1495) ; C9.2 270,105 255,90 112.8,90 66.48,136.32 64.51,136.32 54.29,146.54 S2.1 54.29,150.47 78.13,174.31 80.47,174.31 271.16,365 U1.2 U1.3 ; C17.2 C19.2 387,1592.39 397.6,1602.99 IC2.1 ; IC3.2 617.4,1602.13 624.67,1594.85 624.67,1568.33 C21.2 ; v1(630,1470) 628,1472 C21.2 ; C20.2 C21.2 ; U2.24 U2.32 U2.21 U2.29 U2.20 U2.28 U2.19 U2.30 U2.22 ; S1.1 1333.5,255.93 1364.67,287.09 1364.67,311.67 C2.2 C1.2 1369,351 1404,351 C3.1
  Bottom Layer w15: J3.4 v1(75,910) 95,890 ; v1@85,610 v1(87.31,610) 92.31,615 140,615 ; 280,1715 280,1645 288.79,1636.21 301.21,1636.21 358.35,1693.35 358.35,1723.35 v1(360,1725) ; 516.21,1565 525,1556.21 v1(525,1475) 530,1470 v1(630,1470) ; C15.2 C14.2 736.5,904.5 778.5,904.5 R9.1 781,904 826,904 R8.2 ; v1(765,345.43) 765.43,345.43 777.2,357.2 U3.22 ; U3.25 841.06,477.32 U3.50@855.94,492.21 ; U3.51 U3.50@855.94,492.21 ; U2.31 862,498.27 U3.50@855.94,492.21 ; U3.55 U3.52 U3.53 U3.54 U3.45 U3.46 ; v1(1035,315) 1052.8,332.8 U3.12 ; U3.8 999.65,504.88 U3.47 ; U3.6 974.06,560 ; U3.4 999.65,615.12 U3.46 ; U3.44 v1(1067.6,750) v1@1075,750 ; v1(1225,730) 1245,750 ; U3.50@855.94,492.21 U3.50 U3.49 U3.48 U3.47 ; U3.47 974.06,560 ; 974.06,560 U3.46
MCU_BOOT0: J3.2 U3.26 | length 1257.3
  Top Layer w8: J3.2 210,1225 355,1080 v1(355,914.5)
  Bottom Layer w8: v1(355,914.5) 355,645 465,535 636.5,535 666.62,504.88 U3.26
NetANT1_1: ANT1.1 C10.1 L3.1 | length 114.4
  Top Layer w8: C10.1 158.94,1594.06 L3.1@189.72,1594.06 ; ANT1.1 176.02,1607.76 L3.1@189.72,1594.06 ; L3.1 190.67,1593.11 L3.1@189.72,1594.06
NetC4_1: C4.1 R2.1 R3.2 U1.6 | length 544.6
  Top Layer w8: R2.1 R3.2 68,415 80,415 ; U1.6 80,415 ; C4.1 181,664 168,677 117.81,677 61.5,620.69 61.5,548.54 80,530.04 80,415
NetC5_1: C5.1 R4.2 R5.2 U1.7 | length 295.6
  Top Layer w8: U1.7 164.72,365 215,415.28 215,528 R4.2 C5.1 182,531 182,574 R5.2
NetC6_2: C6.2 R6.2 S1.3 | length 573.5
  Top Layer w8: C6.2 R6.2 1432,493 1450,475 1450,107.8 1412.18,69.98 1412.18,68.01 1398.46,54.29 S1.3
NetC9_1: C9.1 S2.3 U3.19 | length 724.1
  Top Layer w8: S2.3 217.21,213 353,213 v2(375,235)
  Bottom Layer w8: v2(375,235) 459.62,319.62 808.59,319.62 856.01,367.04 856.01,380.93 U3.19
NetIC3_5: IC3.5 R10.1 | length 182.6
  Top Layer w8: IC3.5 580,1690 598.7,1671.3 649.11,1671.3 672.41,1648 R10.1
NetJ3_1: J3.1 R7.1 | length 99.1
  Top Layer w8: J3.1 90,1310 90,1311.36 93.64,1315 R7.1
NetJ3_3: J3.3 R8.1 | length 1504.5
  Top Layer w8: J3.3 275,1125 335,1065 335,965 310,940 310,880 332,858 373,858 400,885 400,940 373,967 373,1123 v2(405,1155)
  Bottom Layer w8: v2(405,1155) 705,1155 873,987 R8.1
NetL1_1: L1.1 U3.2 | length 373.9
  Bottom Layer w8: U3.2 1115.24,670.24 1132,687 1132,778.61 1162.8,809.4 L1.1
NetL1_2: L1.2 U3.3 | length 677.4
  Top Layer w8: v1(1213.81,805) 1296.35,805 1310.16,818.81 1392.69,818.81 v1(1413.25,798.25)
  Bottom Layer w8: U3.3 1117.68,642.68 1150,675 1150,741.19 v1(1213.81,805) ; L1.2 1439.31,907.9 1439.31,863.35 1440,862.66 1440,825 v1(1413.25,798.25)
NetQ1_1: Q1.1 U3.36 | length 81.4
  Bottom Layer w8: Q1.1 832.32,813.31 U3.36
NetQ1_2: Q1.2 R9.2 | length 50.8
  Bottom Layer w8: R9.2 781,856 829,856 Q1.2
NetU2_4: U2.4 U3.30 | length 2451.6
  Top Layer w8: v1(215,785) 245,815 555.82,815 660,710.82 v1(660,680) ; v1(1167.01,452.99) U2.4
  Bottom Layer w8: v1(215,785) 215,295 350.81,159.19 420.69,159.19 511.5,250 1095,250 1167.01,322.01 v1(1167.01,452.99) ; v1(660,680) 724.88,615.12 U3.30
NetU2_5: U2.5 U3.31 | length 2580.5
  Top Layer w8: v1(690,730) 687.01,732.99 677.01,732.99 565,845 565,1178.64 836.36,1450 982.5,1450 1032.5,1400 1240,1400 1295,1345 1295,1255 1450,1100 1450,750 1407.97,707.97 1306.02,707.97 1288.02,689.97 1288.02,547.59 1279.17,538.74 1279.17,534.92 1256.3,512.05 U2.5
  Bottom Layer w8: v1(690,730) 690,706.07 753.39,642.68 U3.31
NetU2_6: U2.6 U3.32 | length 1956.7
  Top Layer w8: v1(650,815) 652.99,817.99 667.99,817.99 680,830 680,1051.57 950.43,1322 1163,1322 1173.96,1311.04 1173.96,995.17 1111.41,932.62 1111.41,613.59 1153.9,571.1 U2.6
  Bottom Layer w8: v1(650,815) 654.23,815 660.56,808.66 661.34,808.66 730.08,739.92 730.08,696.93 756.77,670.24 U3.32
NetU2_7: U2.7 U3.33 | length 1958.6
  Top Layer w8: v1(600,860) 650,910 650.31,910 655,914.69 655,1052.03 942.97,1340 1170.46,1340 1191.96,1318.5 1191.96,987.72 1129.41,925.17 1129.41,665.59 1164.84,630.16 U2.7
  Bottom Layer w8: v1(600,860) 650,860 755.33,754.67 755.33,715.62 763.53,707.42 764.71,707.42 769.39,702.73 769.39,701.67 773.27,697.8 U3.33
NetU2_8: U2.8 U3.9 | length 821.8
  Top Layer w8: U2.8 1256.3,689.21 1288.02,720.93 1288.02,773.02 1300,785 1345,785 v1(1370,760)
  Bottom Layer w8: U3.9 1102.32,477.32 1130,505 1355,505 1417,567 1417,629.5 1409.19,637.31 1409.19,720.81 v1(1370,760)
NetU2_10: U2.10 U3.28 | length 334.2
  Top Layer w8: U2.10 567.32,748.27 618.06,697.53 618.06,641.94 665,595 v1(685,595)
  Bottom Layer w8: v1(685,595) 720,560 U3.28
NetU2_11: U2.11 U3.43 | length 754.3
  Top Layer w8: U2.11 569.23,675.5 585.31,675.5 599.04,661.77 599.04,630.96 700,530 770,530 790,550 790,670 815,695 v1(850,695)
  Bottom Layer w8: v1(850,695) 958.84,695 981.41,672.43 1007.9,672.43 1023.05,687.57 1023.05,733.01 U3.43
NetU2_12: U2.12 U3.42 | length 813.3
  Top Layer w8: U2.12 567.32,630.16 581.04,616.44 581.04,613.96 695,500 v1(695,440) 916.26,440 1005,528.74 1005,602.26 995,612.26 995,696.9 v1(996.34,698.24)
  Bottom Layer w8: v1(996.34,698.24) 997.01,698.91 997.01,734.53 U3.42
NetU2_13: U2.13 U3.14 | length 763.6
  Top Layer w8: U2.13 598.44,571.1 645,524.54 645,463.67 630,448.67 v1(630,445) ; v1(625,370) 650.31,370 655,365.31 v1(655,293.81)
  Bottom Layer w8: v1(625,370) 625,417.19 629,421.19 629,444 v1(630,445) ; v1(655,293.81) 657.19,296 678.81,296 682.81,300 926.77,300 993.8,367.04 993.8,380.93 U3.14
NetU2_14: U2.14 U3.11 | length 2446
  Top Layer w8: v1(165,730) 430,730 498,662 498,557.75 543.7,512.05 U2.14 ; v1(445,250) 445,245.77 455,235.77 v1(455,100)
  Bottom Layer w8: v1(165,730) 85,730 61.5,706.5 61.5,423.04 343.36,141.19 413.81,141.19 v1(455,100) ; v1(445,250) 463,268 1068,268 1105,305 1105,374.05 1066.47,412.58 1066.35,412.58 1056.73,422.2 U3.11
TX1: U1.4 U2.18 | length 349.8
  Top Layer w8: U1.4 337.44,470 425,470 440,455 440,379.53 543.7,275.83 U2.18
VCC: C16.1 C19.1 C20.1 IC1.4 IC2.2 IC3.3 R10.2 | length 734.4
  Top Layer w15: C16.1 274.67,1568.33 274.67,1576.9 247.6,1603.98 IC1.4 247.6,1627.6 277.89,1657.89 453.34,1657.89 ; C19.1 434,1566 434,1614.79 IC2.2 439.31,1620.1 439.31,1643.86 453.34,1657.89 ; C20.1 714,1566 714,1601 R10.2 659.11,1602 650.49,1610.62 650.49,1639.51 642.81,1647.19 592.41,1647.19 581.7,1657.89 453.34,1657.89
VDD_RF: C1.1 C2.1 C7.1 C8.1 C12.1 C13.1 C17.1 IC1.5 Q1.3 R1.2 R7.2 U2.1 U3.5 U3.7 | length 3440.6
  Top Layer w8: R7.2 336,1361 358,1383 ; IC1.5 322.4,1575.4 C17.1 312,1518 380,1450 380,1405 358,1383 ; v1(385,1355) 358,1382 358,1383 ; U2.1 1305.83,275.83 1322,292 C2.1 C1.1 R1.2 1322,530.66 1338.43,547.09 1338.43,590.89 1354.87,607.32 1367.32,607.32 v1(1385,625)
  Bottom Layer w8: v1(385,1355) 345,1315 345,1251.05 383.02,1213.02 691.98,1213.02 925,980 C7.1 ; Q1.3 892.4,835.32 902.05,844.97 902.05,848.31 906.74,853 C7.1 ; U3.7 1147.44,532.44 1170,555 1170,587.56 ; U3.5 1170,587.56 ; C7.1 C8.1 C12.1 C13.1 1068.86,891.86 1068.86,1004.96 1100.89,1036.99 1263.01,1036.99 1310.01,989.99 1310.01,649.99 1335,625 v1(1385,625) 1340,580 1202.15,580 1194.59,587.56 1170,587.56
VDD_USB: C14.1 C15.1 C21.1 IC3.1 J1.1 U3.35 | length 2129.4
  Top Layer w8: v1(520,980) 495,1005 495,1268.09 582,1355.09 C21.1 581,1566 581,1609 IC3.1 ; v1(600,920) 598.3,921.7 598.3,1020.78 954.72,1377.2 1228.11,1377.2 1232.8,1372.52 J1.1
  Bottom Layer w8: v1(520,980) 577.01,922.99 597.01,922.99 602.99,917.01 620.16,917.01 677.17,860 C14.1 735,840 804.76,770.24 U3.35
pads on no net: ANT1.2 IC1.1 IC1.3 IC2.4 IC2.5 IC3.4 J1. J1.P1 J1.P2 S1.2 S1.4 S2.2 S2.4 U1.1 U3.10 U3.13 U3.15 U3.16 U3.17 U3.18 U3.20 U3.21 U3.27 U3.29 U3.37 U3.39 U3.40 U3.41

## Polygon pours and split planes (outlines as drawn)
GND on Bottom Layer "GND_L04_P001" (solid, pour order 1): 0,-5 545,-5 545,225 550,230 1255,230 1255,-5 1480,-5 1480,1780 215,1780 215,1615 0,1615 0,-10
GND on Top Layer "GND_L01_P000" (solid, pour order 0): 0,-5 545,-5 545,225 550,230 1255,230 1255,-5 1480,-5 1480,1780 215,1780 215,1615 0,1615
VDD_RF on POWER (split plane): 1459.9,15.1 20.1,15.1 20.1,1759.9 1459.9,1759.9
GND on GND (split plane): 1459.9,15.1 20.1,15.1 20.1,1759.9 1459.9,1759.9

## Silkscreen, mask and mechanical layers (free items; w line width, h text height)
Mechanical 1:
  the board outline again, w30